# EAGLE board w12-reflect (EAGLE 7.5.0)
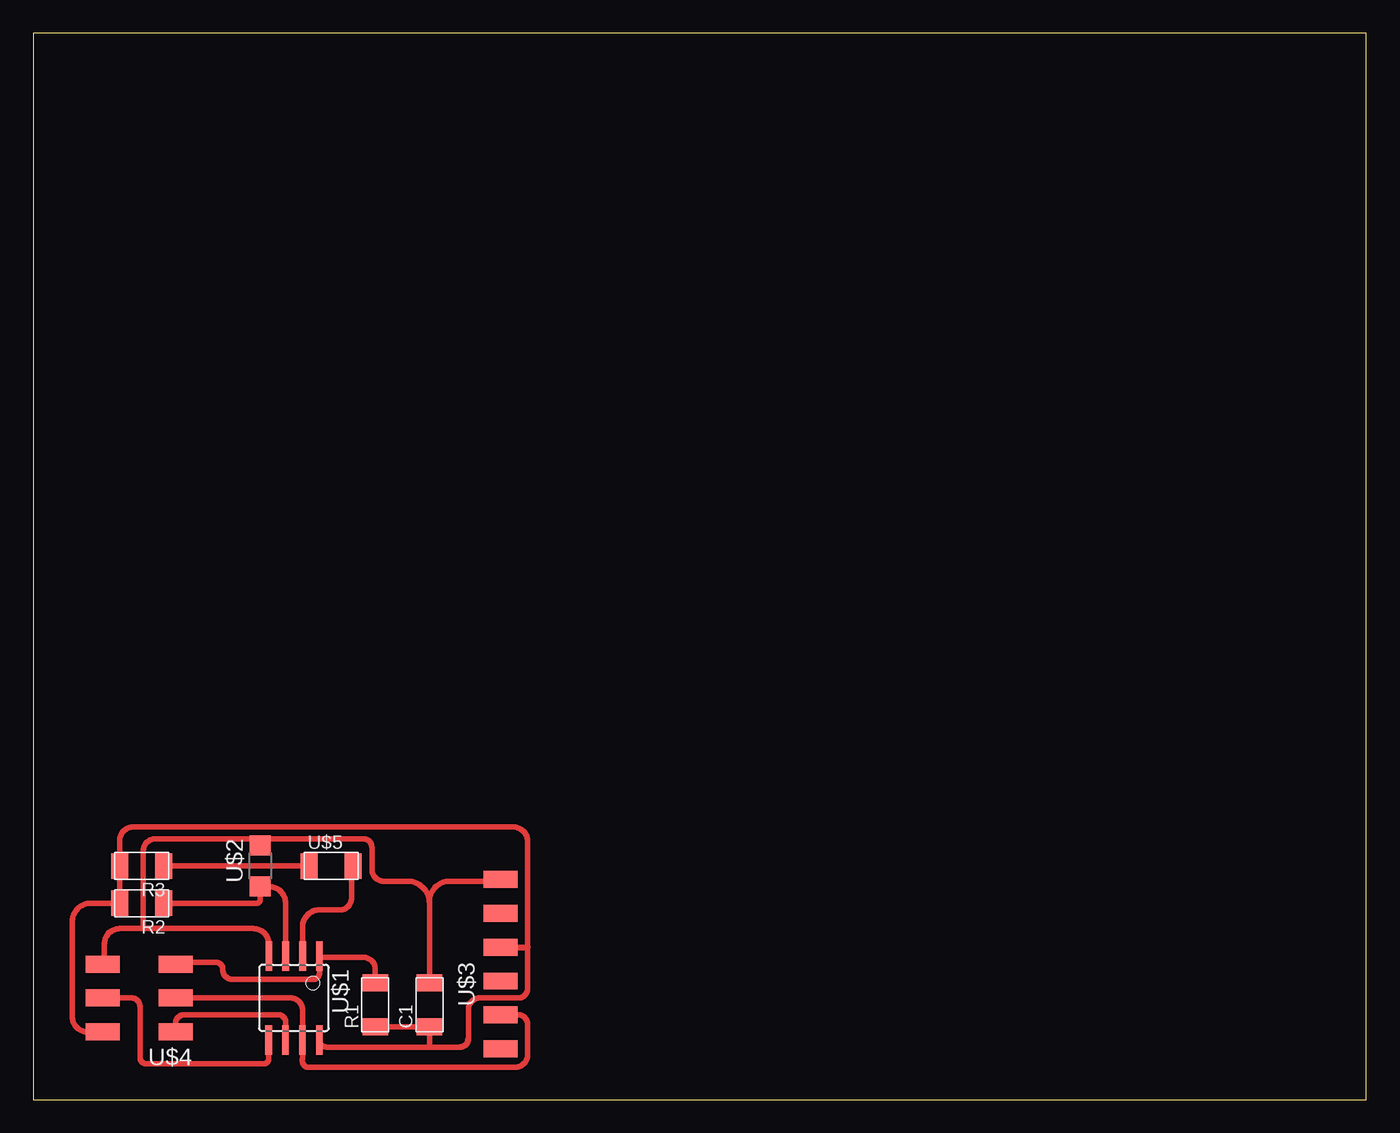
[diagram p0: board, top side]

Size 100 x 80 mm. Coordinates in mm from the lower left corner, seen from the top.
Outline: 0,0 100,0 100,80 0,80 0,0
Copper layers (1*16): Top 0.035mm / dielectric 1.5mm / Bottom 0.035mm
Design rules "fab": minimum track width 0.3mm, minimum drill 32mil, track to track 0.397mm, track to pad 0.397mm, pad to pad 0.397mm, via to via 0.397mm, smd to smd 0.315mm, copper to edge 40mil, drill to drill 16mil, minimum pad ring 10mil, minimum via ring 8mil, stop-mask expansion 4mil, vias tented up to drill 0mil, thermal gap 10mil
Net classes: 0 default: width 0.483 mm

## Footprints (pad centres in the part's own frame; a part is rotated, then mirrored left to right if it is on the bottom)
C1206FAB = smd 1.27 x 1.905: 1 -1.651,0; 2 1.651,0
R1206FAB = smd 1.27 x 1.905: 1 -1.651,0; 2 1.651,0
SOIC8 = smd 0.5 x 2.2: 1 -1.905,-3.154; 2 -0.645,-3.154; 3 0.625,-3.154; 4 1.895,-3.154; 5 1.905,3.154; 6 0.635,3.154; 7 -0.635,3.154; 8 -1.905,3.154
OP1206 = smd 1.5 x 1.6: COLLECTOR -1.55,0; EMITTER 1.55,0
1X06SMD = smd 2.54 x 1.27: 1 0,6.35; 2 0,3.81; 3 0,1.27; 4 0,-1.27; 5 0,-3.81; 6 0,-6.35
2X03SMD = smd 2.54 x 1.27: 1 -2.54,2.54; 2 2.92,2.54; 3 -2.54,0; 4 2.92,0; 5 -2.54,-2.54; 6 2.92,-2.54
LED1206FAB = smd 1.27 x 1.905: 1 -1.651,0; 2 1.651,0

## Placement (x,y rotation side)
C1  CAP-US1206FAB  [C1206FAB]  29.72,7.11 90 top
R1  10k  [R1206FAB]  25.65,7.11 90 top
R2  49.9k  [R1206FAB]  8.13,14.73 180 top
R3  1k  [R1206FAB]  8.13,17.53 180 top
U$1  ATTINY45SI  [SOIC8]  19.56,7.62 180 top
U$2  PHOTOTRANSISTOR-NPN1206  [OP1206]  17.02,17.53 90 top
U$3  FTDI-SMD-HEADER  [1X06SMD]  35.05,10.16 0 top
U$4  AVRISPSMD  [2X03SMD]  8.13,7.62 180 top
U$5  LEDFAB1206  [LED1206FAB]  22.35,17.53 0 top

## Library data of the parts
C1 R1-R3 U$1-U$5 = fab

## Nets
GND: C1.2 U$1.4 U$2.EMITTER U$3.1 U$4.6
LED: U$1.2 U$5.2
MISO: U$1.6 U$4.1
MOSI: U$1.5 U$4.4
N$3: R3.1 U$5.1
PT: R2.1 U$1.3 U$2.COLLECTOR
RST: R1.2 U$1.1 U$4.5
SCK: U$1.7 U$3.5 U$4.3
VCC: C1.1 R1.1 R2.2 R3.2 U$1.8 U$3.3 U$4.2

## Tracks (layer width: path | path; a pad name or v marks a point on that pad's centre or on a via)
GND
  Top 0.406: U$3.1 arc-90 34.92,16.38 31.24,16.38 arc90 29.72,14.86 29.72,14.73 | U$4.6 arc90 5.33,10.29 5.33,11.68 arc-90 6.48,12.83 8.26,12.83 | 8.26,12.83 16.51,12.83 arc-90 17.66,11.67 U$1.4 | U$2.EMITTER 17.02,19.3 arc90 16.76,19.56 | 16.76,19.56 9.14,19.56 arc90 8.26,18.67 8.26,12.83 | C1.2 29.72,14.73 | 29.72,14.73 arc90 28.07,16.38 26.29,16.38 arc-90 25.4,17.27 25.4,18.92 arc90 24.77,19.56 16.76,19.56
LED
  Top 0.406: U$5.2 arc90 23.88,17.4 23.88,15.11 arc-90 22.99,14.22 21.46,14.22 arc90 20.2,12.96 U$1.2
MISO
  Top 0.406: U$1.6 18.92,5.84 arc90 18.41,6.35 11.3,6.35 arc90 10.67,5.71 U$4.1
MOSI
  Top 0.406: U$1.5 17.65,3.05 arc-90 17.27,2.67 8.51,2.67 arc-90 8,3.17 8,6.99 arc90 7.37,7.62 U$4.4
N$3
  Top 0.406: R3.1 U$5.1
PT
  Top 0.406: U$1.3 arc-90 18.92,10.78 18.92,14.73 arc90 17.68,15.98 U$2.COLLECTOR 17.02,14.99 arc-90 16.76,14.73 R2.1
RST
  Top 0.406: U$4.5 arc-90 10.79,10.29 13.72,10.29 arc-90 14.22,9.78 arc90 14.86,9.02 21.08,9.02 arc90 21.46,9.78 U$1.1 arc90 21.57,10.67 24.77,10.67 arc-90 25.65,9.78 R1.2
SCK
  Top 0.406: U$4.3 19.3,7.62 arc-90 20.19,6.73 U$1.7 20.19,3.05 arc90 20.57,2.41 36.2,2.41 arc90 37.08,3.43 37.08,5.71 arc90 36.32,6.35 | U$3.5 arc-90 35.18,6.22
  Top 0.457: 35.18,6.22 arc-90 35.31,6.35 36.32,6.35
VCC
  Top 0.406: R1.1 C1.1 29.72,3.94 | U$4.2 4.06,5.08 arc-90 2.92,6.22 2.92,13.34 arc-90 4.32,14.73 R2.2 R3.2 6.48,19.43 arc-90 7.49,20.45 35.94,20.45 arc-90 37.08,19.43 37.08,11.43 37.08,8.26 arc-90 36.32,7.62 33.66,7.62 arc90 32.64,6.86 32.64,4.57 | 29.72,3.94 21.99,3.94 arc-90 U$1.8 | 29.72,3.94 32,3.94
  Top 0.457: 32,3.94 arc90 32.64,4.57 | U$3.3 37.08,11.43